# EAGLE board 4_bit_ALU (EAGLE 8.3.2)

Size 150 x 110 mm. Coordinates in mm from the lower left corner, seen from the top.
Outline: 0,0 150,0 150,110 0,110 0,0
Copper layers (1*16): Top 0.07mm / dielectric 30mil / Bottom 0.07mm
Design rules "OSH_PARK_RULES_custom *": minimum track width 30mil, minimum drill 16mil, track to track 6mil, track to pad 6mil, pad to pad 6mil, via to via 6mil, smd to smd 6mil, copper to edge 15mil, drill to drill 6mil, minimum pad ring 7mil, minimum via ring 7mil, stop-mask expansion 3mil, vias tented up to drill 0mil, thermal gap 10mil

## Footprints (pad centres in the part's own frame; a part is rotated, then mirrored left to right if it is on the bottom)
DO41-10 = drill 1.118: A 5.08,0; C -5.08,0
C1702-15 = drill 1.397 long: A 7.62,0; C -7.62,0
PY14-02 = drill 1.3: 11 6.6,6.35; 12 6.6,16.7; 14 6.6,12.7; 21 2.2,6.35; 22 2.2,16.7; 24 2.2,12.7; 31 -2.2,6.35; 32 -2.2,16.7; 34 -2.2,12.7; 41 -6.6,6.35; 42 -6.6,16.7; 44 -6.6,12.7; A1 6.6,0; A2 -6.6,0
LED3MM = drill 0.813 octagon: A -1.27,0; K 1.27,0
55917-1230 = drill 0.8: 1 -5,-2.5; 2 -5,2.5; 3 -3,-2.5; 4 -3,2.5; 5 -1,-2.5; 6 -1,2.5; 7 1,-2.5; 8 1,2.5; 9 3,-2.5; 10 3,2.5; 11 5,-2.5; 12 5,2.5
1751248 = drill 1.1 pad 1.7: 1 -1.75,-0.1; 2 1.75,-0.1

## Placement (x,y rotation side)
DECODE:D1  1N4007  [DO41-10]  62,62 0 top
DECODE:D2  1N5359  [C1702-15]  62,66 180 top
DECODE:D3  1N4007  [DO41-10]  85,62 0 top
DECODE:D4  1N5359  [C1702-15]  86,66 180 top
DECODE:D5  1N4007  [DO41-10]  110,62 0 top
DECODE:D6  1N5359  [C1702-15]  110,66 180 top
DECODE:K1  PY14-02  [PY14-02]  62,75 0 top
DECODE:K2  PY14-02  [PY14-02]  86,75 0 top
DECODE:K3  PY14-02  [PY14-02]  110,75 0 top
INPUT_BLK:LED1  [LED3MM]  31.67,102.89 90 top
INPUT_BLK:LED2  [LED3MM]  36.64,102.89 90 top
INPUT_BLK:LED3  [LED3MM]  41.61,102.89 90 top
INPUT_BLK:LED4  [LED3MM]  48.58,102.89 90 top
INPUT_BLK:LED5  [LED3MM]  53.55,102.89 90 top
INPUT_BLK:LED6  [LED3MM]  58.52,102.89 90 top
INPUT_BLK:LED7  [LED3MM]  63.49,102.89 90 top
INPUT_BLK:LED8  [LED3MM]  68.46,102.89 90 top
INPUT_BLK:LED9  [LED3MM]  73.43,102.89 90 top
INPUT_BLK:LED10  [LED3MM]  78.4,102.89 90 top
INPUT_BLK:LED11  [LED3MM]  83.37,102.89 90 top
INPUT_BLK:X1  55917-1230  [55917-1230]  19.7,103.84 0 top
LOGIC:1_BIT_LOGIC0:D1  1N4007  [DO41-10]  14,62 0 top
LOGIC:1_BIT_LOGIC0:D2  1N5359  [C1702-15]  14,66 180 top
LOGIC:1_BIT_LOGIC0:D3  1N4007  [DO41-10]  38,62 0 top
LOGIC:1_BIT_LOGIC0:D4  1N5359  [C1702-15]  38,66 180 top
LOGIC:1_BIT_LOGIC0:K1  PY14-02  [PY14-02]  14,75 0 top
LOGIC:1_BIT_LOGIC0:K2  PY14-02  [PY14-02]  38,75 0 top
LOGIC:1_BIT_LOGIC1:D1  1N4007  [DO41-10]  61,25 0 top
LOGIC:1_BIT_LOGIC1:D2  1N5359  [C1702-15]  61,29 180 top
LOGIC:1_BIT_LOGIC1:D3  1N4007  [DO41-10]  109,27 0 top
LOGIC:1_BIT_LOGIC1:D4  1N5359  [C1702-15]  109,30 180 top
LOGIC:1_BIT_LOGIC1:K1  PY14-02  [PY14-02]  61,38 0 top
LOGIC:1_BIT_LOGIC1:K2  PY14-02  [PY14-02]  109,38 0 top
LOGIC:1_BIT_LOGIC2:D1  1N4007  [DO41-10]  133,26 0 top
LOGIC:1_BIT_LOGIC2:D2  1N5359  [C1702-15]  134,30 180 top
LOGIC:1_BIT_LOGIC2:D3  1N4007  [DO41-10]  84,26 0 top
LOGIC:1_BIT_LOGIC2:D4  1N5359  [C1702-15]  85,30 180 top
LOGIC:1_BIT_LOGIC2:K1  PY14-02  [PY14-02]  134,38 0 top
LOGIC:1_BIT_LOGIC2:K2  PY14-02  [PY14-02]  85,38 0 top
LOGIC:1_BIT_LOGIC3:D1  1N4007  [DO41-10]  10,26 0 top
LOGIC:1_BIT_LOGIC3:D2  1N5359  [C1702-15]  12,29 180 top
LOGIC:1_BIT_LOGIC3:D3  1N4007  [DO41-10]  37,26 0 top
LOGIC:1_BIT_LOGIC3:D4  1N5359  [C1702-15]  37,29 180 top
LOGIC:1_BIT_LOGIC3:K1  PY14-02  [PY14-02]  12,38 0 top
LOGIC:1_BIT_LOGIC3:K2  PY14-02  [PY14-02]  37,38 0 top
PWR_BLK:PWR  PWR_BLK  [1751248]  5.59,103.36 0 top

## Library data of the parts
DECODE:D1-DECODE:D6 DECODE:K1-DECODE:K3 INPUT_BLK:LED1-INPUT_BLK:LED11 LOGIC:1_BIT_LOGIC0:D1-LOGIC:1_BIT_LOGIC0:D4 LOGIC:1_BIT_LOGIC0:K1 LOGIC:1_BIT_LOGIC0:K2 LOGIC:1_BIT_LOGIC1:D1-LOGIC:1_BIT_LOGIC1:D4 LOGIC:1_BIT_LOGIC1:K1 LOGIC:1_BIT_LOGIC1:K2 LOGIC:1_BIT_LOGIC2:D1-LOGIC:1_BIT_LOGIC2:D4 LOGIC:1_BIT_LOGIC2:K1 LOGIC:1_BIT_LOGIC2:K2 LOGIC:1_BIT_LOGIC3:D1-LOGIC:1_BIT_LOGIC3:D4 LOGIC:1_BIT_LOGIC3:K1 LOGIC:1_BIT_LOGIC3:K2 = relay_computer_custom
INPUT_BLK:X1 = relay_computer_custom; MPN: 55917-1230; OC_FARNELL: unknown; OC_NEWARK: unknown
PWR_BLK:PWR = relay_computer_custom; OC_FARNELL: unknown; OC_NEWARK: unknown

## Nets
+12V: DECODE:K1.41 LOGIC:1_BIT_LOGIC0:K1.21 LOGIC:1_BIT_LOGIC0:K1.31 LOGIC:1_BIT_LOGIC0:K1.41 LOGIC:1_BIT_LOGIC0:K2.21 LOGIC:1_BIT_LOGIC1:K1.21 LOGIC:1_BIT_LOGIC1:K1.31 LOGIC:1_BIT_LOGIC1:K1.41 LOGIC:1_BIT_LOGIC1:K2.21 LOGIC:1_BIT_LOGIC2:K1.21 LOGIC:1_BIT_LOGIC2:K1.31 LOGIC:1_BIT_LOGIC2:K1.41 LOGIC:1_BIT_LOGIC2:K2.21 LOGIC:1_BIT_LOGIC3:K1.21 LOGIC:1_BIT_LOGIC3:K1.31 LOGIC:1_BIT_LOGIC3:K1.41 LOGIC:1_BIT_LOGIC3:K2.21 PWR_BLK:PWR.2
A0: INPUT_BLK:LED7.A INPUT_BLK:X1.11 LOGIC:1_BIT_LOGIC0:D1.C LOGIC:1_BIT_LOGIC0:K1.A2
A1: INPUT_BLK:LED6.A INPUT_BLK:X1.9 LOGIC:1_BIT_LOGIC1:D1.C LOGIC:1_BIT_LOGIC1:K1.A2
A2: INPUT_BLK:LED5.A INPUT_BLK:X1.7 LOGIC:1_BIT_LOGIC2:D1.C LOGIC:1_BIT_LOGIC2:K1.A2
A3: INPUT_BLK:LED4.A INPUT_BLK:X1.5 LOGIC:1_BIT_LOGIC3:D1.C LOGIC:1_BIT_LOGIC3:K1.A2
AND0: LOGIC:1_BIT_LOGIC0:K2.11
AND1: LOGIC:1_BIT_LOGIC1:K2.11
AND2: LOGIC:1_BIT_LOGIC2:K2.11
AND3: LOGIC:1_BIT_LOGIC3:K2.11
B0: INPUT_BLK:LED11.A INPUT_BLK:X1.6 LOGIC:1_BIT_LOGIC0:D3.C LOGIC:1_BIT_LOGIC0:K2.A2
B1: INPUT_BLK:LED10.A INPUT_BLK:X1.8 LOGIC:1_BIT_LOGIC1:D3.C LOGIC:1_BIT_LOGIC1:K2.A2
B2: INPUT_BLK:LED9.A INPUT_BLK:X1.10 LOGIC:1_BIT_LOGIC2:D3.C LOGIC:1_BIT_LOGIC2:K2.A2
B3: INPUT_BLK:LED8.A INPUT_BLK:X1.12 LOGIC:1_BIT_LOGIC3:D3.C LOGIC:1_BIT_LOGIC3:K2.A2
DECODE:D$1: DECODE:D1.A DECODE:D2.A
DECODE:D$2: DECODE:D3.A DECODE:D4.A
DECODE:D$3: DECODE:D5.A DECODE:D6.A
DECODE:N$1: DECODE:K1.44 DECODE:K2.41
DECODE:N$2: DECODE:K1.42 DECODE:K2.31
DECODE:N$3: DECODE:K2.44 DECODE:K3.41
DECODE:N$4: DECODE:K2.42 DECODE:K3.31
DECODE:N$5: DECODE:K2.34 DECODE:K3.21
DECODE:N$6: DECODE:K2.32 DECODE:K3.11
ENABLE_CTL0: DECODE:K3.12
ENABLE_CTL1: DECODE:K3.14
ENABLE_CTL2: DECODE:K3.22
ENABLE_CTL3: DECODE:K3.24
ENABLE_CTL4: DECODE:K3.32
ENABLE_CTL5: DECODE:K3.34
ENABLE_CTL6: DECODE:K3.42
ENABLE_CTL7: DECODE:K3.44
FUNC0: DECODE:D5.C DECODE:K3.A2 INPUT_BLK:LED3.A INPUT_BLK:X1.3
FUNC1: DECODE:D3.C DECODE:K2.A2 INPUT_BLK:LED2.A INPUT_BLK:X1.1
FUNC2: DECODE:D1.C DECODE:K1.A2 INPUT_BLK:LED1.A INPUT_BLK:X1.2
GND: DECODE:D2.C DECODE:D4.C DECODE:D6.C DECODE:K1.A1 DECODE:K2.A1 DECODE:K3.A1 INPUT_BLK:LED1.K INPUT_BLK:LED2.K INPUT_BLK:LED3.K INPUT_BLK:LED4.K INPUT_BLK:LED5.K INPUT_BLK:LED6.K INPUT_BLK:LED7.K INPUT_BLK:LED8.K INPUT_BLK:LED9.K INPUT_BLK:LED10.K INPUT_BLK:LED11.K LOGIC:1_BIT_LOGIC0:D2.C LOGIC:1_BIT_LOGIC0:D4.C LOGIC:1_BIT_LOGIC0:K1.A1 LOGIC:1_BIT_LOGIC0:K2.A1 LOGIC:1_BIT_LOGIC1:D2.C LOGIC:1_BIT_LOGIC1:D4.C LOGIC:1_BIT_LOGIC1:K1.A1 LOGIC:1_BIT_LOGIC1:K2.A1 LOGIC:1_BIT_LOGIC2:D2.C LOGIC:1_BIT_LOGIC2:D4.C LOGIC:1_BIT_LOGIC2:K1.A1 LOGIC:1_BIT_LOGIC2:K2.A1 LOGIC:1_BIT_LOGIC3:D2.C LOGIC:1_BIT_LOGIC3:D4.C LOGIC:1_BIT_LOGIC3:K1.A1 LOGIC:1_BIT_LOGIC3:K2.A1 PWR_BLK:PWR.1
LOGIC:1_BIT_LOGIC0:D$1: LOGIC:1_BIT_LOGIC0:D1.A LOGIC:1_BIT_LOGIC0:D2.A
LOGIC:1_BIT_LOGIC0:D$2: LOGIC:1_BIT_LOGIC0:D3.A LOGIC:1_BIT_LOGIC0:D4.A
LOGIC:1_BIT_LOGIC0:N$1: LOGIC:1_BIT_LOGIC0:K1.44 LOGIC:1_BIT_LOGIC0:K2.14
LOGIC:1_BIT_LOGIC0:N$2: LOGIC:1_BIT_LOGIC0:K1.24 LOGIC:1_BIT_LOGIC0:K2.32
LOGIC:1_BIT_LOGIC0:N$3: LOGIC:1_BIT_LOGIC0:K1.22 LOGIC:1_BIT_LOGIC0:K2.34
LOGIC:1_BIT_LOGIC1:D$1: LOGIC:1_BIT_LOGIC1:D1.A LOGIC:1_BIT_LOGIC1:D2.A
LOGIC:1_BIT_LOGIC1:D$2: LOGIC:1_BIT_LOGIC1:D3.A LOGIC:1_BIT_LOGIC1:D4.A
LOGIC:1_BIT_LOGIC1:N$1: LOGIC:1_BIT_LOGIC1:K1.44 LOGIC:1_BIT_LOGIC1:K2.14
LOGIC:1_BIT_LOGIC1:N$2: LOGIC:1_BIT_LOGIC1:K1.24 LOGIC:1_BIT_LOGIC1:K2.32
LOGIC:1_BIT_LOGIC1:N$3: LOGIC:1_BIT_LOGIC1:K1.22 LOGIC:1_BIT_LOGIC1:K2.34
LOGIC:1_BIT_LOGIC2:D$1: LOGIC:1_BIT_LOGIC2:D1.A LOGIC:1_BIT_LOGIC2:D2.A
LOGIC:1_BIT_LOGIC2:D$2: LOGIC:1_BIT_LOGIC2:D3.A LOGIC:1_BIT_LOGIC2:D4.A
LOGIC:1_BIT_LOGIC2:N$1: LOGIC:1_BIT_LOGIC2:K1.44 LOGIC:1_BIT_LOGIC2:K2.14
LOGIC:1_BIT_LOGIC2:N$2: LOGIC:1_BIT_LOGIC2:K1.24 LOGIC:1_BIT_LOGIC2:K2.32
LOGIC:1_BIT_LOGIC2:N$3: LOGIC:1_BIT_LOGIC2:K1.22 LOGIC:1_BIT_LOGIC2:K2.34
LOGIC:1_BIT_LOGIC3:D$1: LOGIC:1_BIT_LOGIC3:D1.A LOGIC:1_BIT_LOGIC3:D2.A
LOGIC:1_BIT_LOGIC3:D$2: LOGIC:1_BIT_LOGIC3:D3.A LOGIC:1_BIT_LOGIC3:D4.A
LOGIC:1_BIT_LOGIC3:N$1: LOGIC:1_BIT_LOGIC3:K1.44 LOGIC:1_BIT_LOGIC3:K2.14
LOGIC:1_BIT_LOGIC3:N$2: LOGIC:1_BIT_LOGIC3:K1.24 LOGIC:1_BIT_LOGIC3:K2.32
LOGIC:1_BIT_LOGIC3:N$3: LOGIC:1_BIT_LOGIC3:K1.22 LOGIC:1_BIT_LOGIC3:K2.34
NOT0: LOGIC:1_BIT_LOGIC0:K1.42
NOT1: LOGIC:1_BIT_LOGIC1:K1.42
NOT2: LOGIC:1_BIT_LOGIC2:K1.42
NOT3: LOGIC:1_BIT_LOGIC3:K1.42
OR0: LOGIC:1_BIT_LOGIC0:K1.34 LOGIC:1_BIT_LOGIC0:K2.24
OR1: LOGIC:1_BIT_LOGIC1:K1.34 LOGIC:1_BIT_LOGIC1:K2.24
OR2: LOGIC:1_BIT_LOGIC2:K1.34 LOGIC:1_BIT_LOGIC2:K2.24
OR3: LOGIC:1_BIT_LOGIC3:K1.34 LOGIC:1_BIT_LOGIC3:K2.24
XOR0: LOGIC:1_BIT_LOGIC0:K2.31
XOR1: LOGIC:1_BIT_LOGIC1:K2.31
XOR2: LOGIC:1_BIT_LOGIC2:K2.31
XOR3: LOGIC:1_BIT_LOGIC3:K2.31

## Tracks (layer width: path | path; a pad name or v marks a point on that pad's centre or on a via)
+12V  (17 unrouted)
A0  (3 unrouted)
A1  (3 unrouted)
A2  (3 unrouted)
A3  (3 unrouted)
B0  (3 unrouted)
B1  (3 unrouted)
B2  (3 unrouted)
B3  (3 unrouted)
DECODE:D$1  (1 unrouted)
DECODE:D$2  (1 unrouted)
DECODE:D$3  (1 unrouted)
DECODE:N$1  (1 unrouted)
DECODE:N$2  (1 unrouted)
DECODE:N$3  (1 unrouted)
DECODE:N$4  (1 unrouted)
DECODE:N$5  (1 unrouted)
DECODE:N$6  (1 unrouted)
FUNC0  (3 unrouted)
FUNC1  (3 unrouted)
FUNC2  (3 unrouted)
GND  (33 unrouted)
LOGIC:1_BIT_LOGIC0:D$1  (1 unrouted)
LOGIC:1_BIT_LOGIC0:D$2  (1 unrouted)
LOGIC:1_BIT_LOGIC0:N$1  (1 unrouted)
LOGIC:1_BIT_LOGIC0:N$2  (1 unrouted)
LOGIC:1_BIT_LOGIC0:N$3  (1 unrouted)
LOGIC:1_BIT_LOGIC1:D$1  (1 unrouted)
LOGIC:1_BIT_LOGIC1:D$2  (1 unrouted)
LOGIC:1_BIT_LOGIC1:N$1  (1 unrouted)
LOGIC:1_BIT_LOGIC1:N$2  (1 unrouted)
LOGIC:1_BIT_LOGIC1:N$3  (1 unrouted)
LOGIC:1_BIT_LOGIC2:D$1  (1 unrouted)
LOGIC:1_BIT_LOGIC2:D$2  (1 unrouted)
LOGIC:1_BIT_LOGIC2:N$1  (1 unrouted)
LOGIC:1_BIT_LOGIC2:N$2  (1 unrouted)
LOGIC:1_BIT_LOGIC2:N$3  (1 unrouted)
LOGIC:1_BIT_LOGIC3:D$1  (1 unrouted)
LOGIC:1_BIT_LOGIC3:D$2  (1 unrouted)
LOGIC:1_BIT_LOGIC3:N$1  (1 unrouted)
LOGIC:1_BIT_LOGIC3:N$2  (1 unrouted)
LOGIC:1_BIT_LOGIC3:N$3  (1 unrouted)
OR0  (1 unrouted)
OR1  (1 unrouted)
OR2  (1 unrouted)
OR3  (1 unrouted)

## Text on the board
tNames: GND | 12V | FUNC | A | B